# EAGLE board UMR2 (EAGLE 6.6.0)
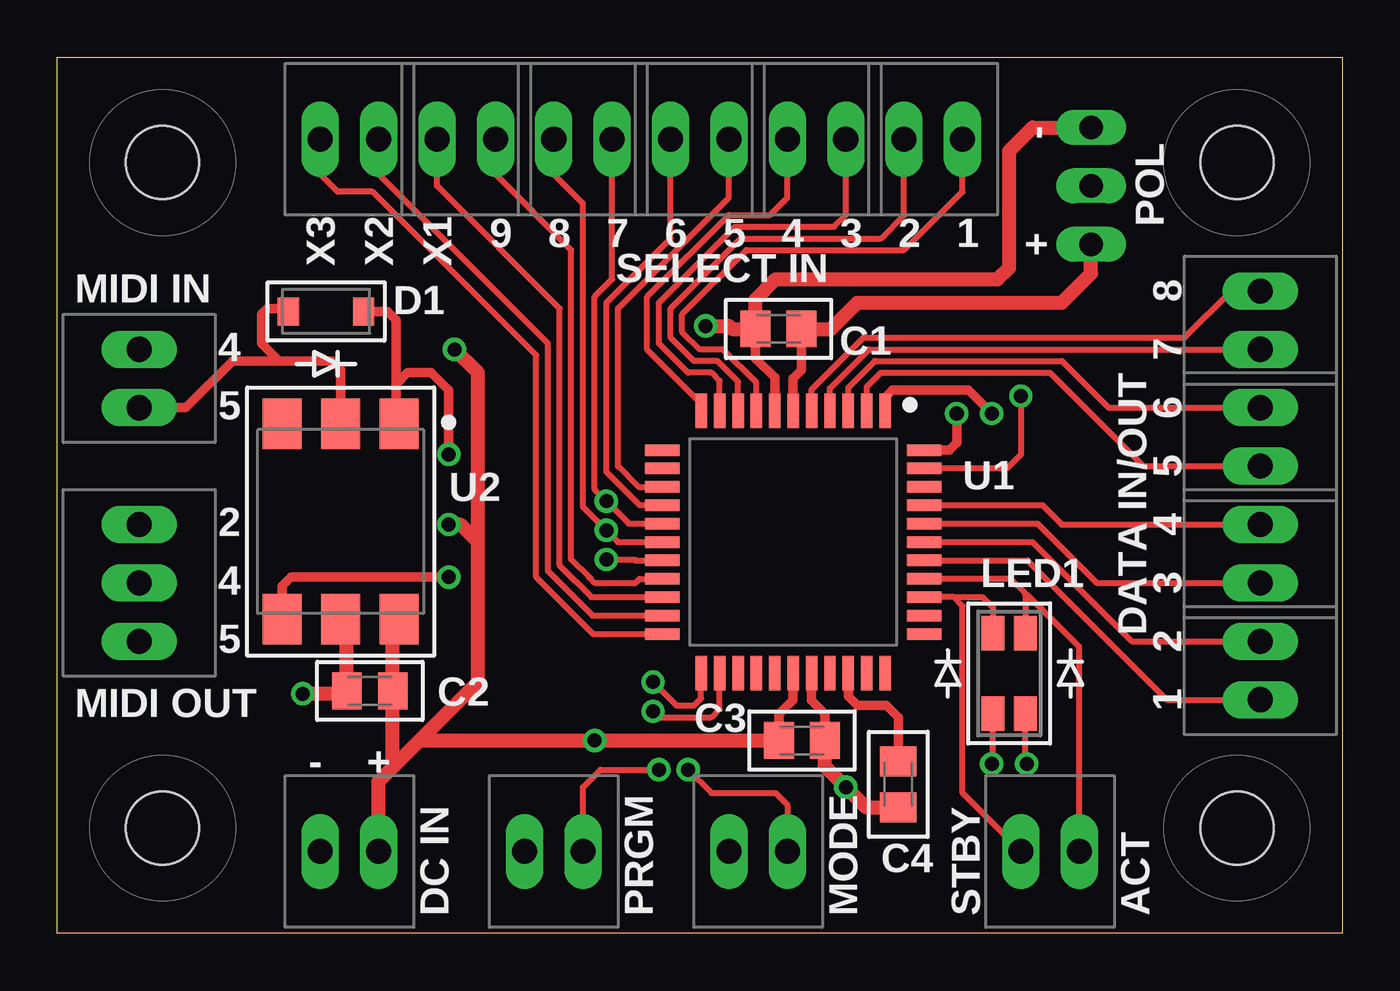
[diagram p0: board, top side]
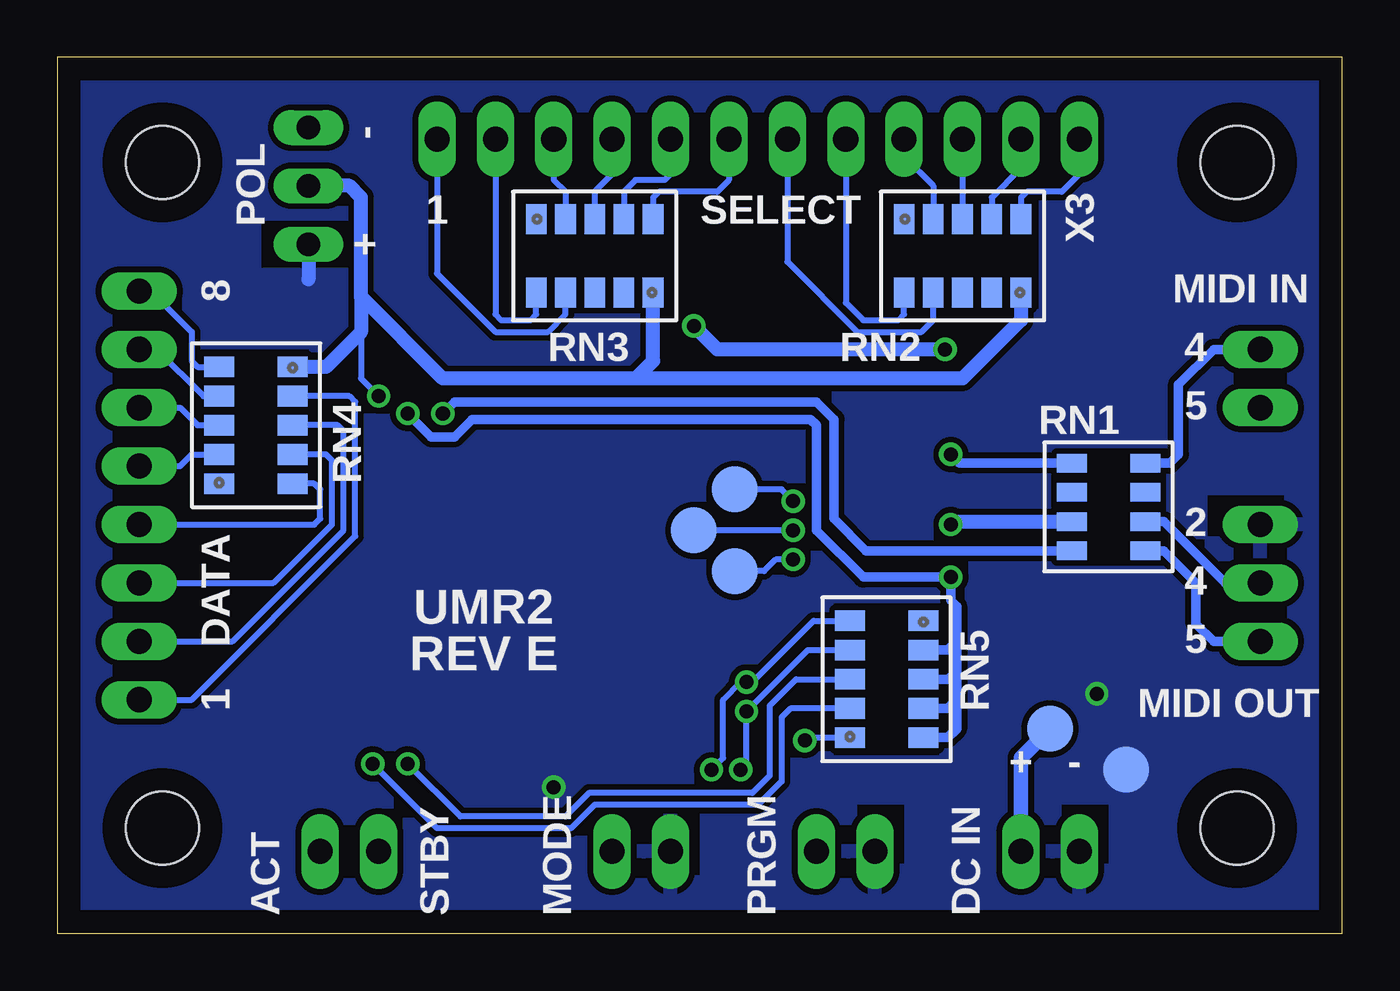
[diagram p1: board, bottom side, seen from below]

Size 55.88 x 38.1 mm. Coordinates in mm from the lower left corner, seen from the top.
Outline: 0,38.1 55.88,38.1 55.88,0 0,0 0,38.1
Copper layers (1*16): Top 0.0178mm / dielectric 59mil / Bottom 0.0178mm
Design rules "SSC-EAGLE-2Lyr_v1.0.0.3": minimum track width 10mil, minimum drill 14mil, track to track 10mil, track to pad 10mil, pad to pad 10mil, via to via 10mil, smd to smd 10mil, copper to edge 40mil, drill to drill 16mil, minimum pad ring 8mil, minimum via ring 8mil, stop-mask expansion 3mil, vias tented up to drill 0mil, thermal gap 10mil
Net classes: 0 default: width 0.254 mm, drill 0.305 mm, clearance 0.254 mm; 2 superfat: width 0.61 mm, drill 0.406 mm, clearance 0.762 mm; 3 grounder: width 0.254 mm, drill 0.508 mm, clearance 0.254 mm
Holes 3.17 mm at 51.31,33.53 4.57,33.53 51.31,4.57 4.57,4.57
bRestrict: area 2.5,17.3 to 5.8,19.1; area 10.2,3 to 12.2,5.6; area 19.1,3 to 21.1,5.6; area 27.9,2.5 to 30,5.1; area 43.2,29 to 47,31

## Footprints (pad centres in the part's own frame; a part is rotated, then mirrored left to right if it is on the bottom)
C0805K = smd 1.3 x 1.6: 1 -1,0; 2 1,0
SOD123-MIRROR = smd 1.219 x 0.914: P$1 0,1.638; P$2 0,-1.638
DOCKPAD-ROUND-2.0MM = smd 2 x 2: P$1 0,0
WIREPAD-NICE = drill 1.016 long: P$1 0,0
TB-2-54-2POS = drill 1.092 long: P$1 1.27,0; P$3 -1.27,0
TB-2-54-3POS = drill 1.092 long: P$1 0,0; P$2 2.54,0; P$3 -2.54,0
HSMF-C15X = smd 1.5 x 1: P$1 -1.75,0.7; P$2 1.75,0.7; P$3 1.75,-0.7; P$4 -1.75,-0.7
CTS-744 = smd 1.3 x 0.8: P$4 -1.6,-0.635; P$5 -1.6,-1.905; P$6 -1.6,0.635; P$7 -1.6,1.905; P$8 1.6,0.635; P$9 1.6,1.905; P$10 1.6,-0.635; P$11 1.6,-1.905
CTS-745 = smd 1.3 x 0.9: P$2 -1.6,0; P$3 1.6,0; P$4 -1.6,-1.27; P$5 -1.6,-2.54; P$6 -1.6,1.27; P$7 -1.6,2.54; P$8 1.6,1.27; P$9 1.6,2.54; P$10 1.6,-1.27; P$11 1.6,-2.54
TQFP44 = smd 1.5 x 0.5: P$1 5.7,0; P$2 -5.7,0; P$5 5.7,-0.8; P$6 5.7,-1.6; P$7 5.7,-2.4; P$8 5.7,-3.2; P$9 5.7,-4; P$10 5.7,0.8; P$11 5.7,1.6; P$12 5.7,2.4; P$13 5.7,3.2; P$14 5.7,4; P$25 -5.7,-0.8; P$26 -5.7,-1.6; P$27 -5.7,-2.4; P$28 -5.7,-3.2; P$29 -5.7,-4; P$30 -5.7,0.8; P$31 -5.7,1.6; P$32 -5.7,2.4; P$33 -5.7,3.2; P$34 -5.7,4 | smd 0.5 x 1.5: P$3 0,-5.7; P$4 0,5.7; P$15 0.8,5.7; P$16 1.6,5.7; P$17 2.4,5.7; P$18 3.2,5.7; P$19 4,5.7; P$20 -0.8,5.7; P$21 -1.6,5.7; P$22 -2.4,5.7; P$23 -3.2,5.7; P$24 -4,5.7; P$35 -0.8,-5.7; P$36 -1.6,-5.7; P$37 -2.4,-5.7; P$38 -3.2,-5.7; P$39 -4,-5.7; P$40 0.8,-5.7; P$41 1.6,-5.7; P$42 2.4,-5.7; P$43 3.2,-5.7; P$44 4,-5.7
SMT-6 = smd 2.2 x 1.7: P$4 4.25,2.54; P$5 4.25,0; P$6 4.25,-2.54; P$7 -4.25,-2.54; P$8 -4.25,0; P$9 -4.25,2.54

## Placement (x,y rotation side)
C1  [C0805K]  31.37,26.29 180 top
C2  [C0805K]  13.59,10.54 0 top
C3  [C0805K]  32.38,8.38 0 top
C4  [C0805K]  36.58,6.48 90 top
D1  [SOD123-MIRROR]  11.68,27.05 270 top
E$3  [DOCKPAD-ROUND-2.0MM]  9.4,7.11 0 bottom
E$4  [DOCKPAD-ROUND-2.0MM]  12.7,8.89 0 bottom
E$11  [WIREPAD-NICE]  44.96,35.05 90 top
E$12  [WIREPAD-NICE]  44.96,32.51 90 top
E$14  [WIREPAD-NICE]  44.96,29.97 90 top
E$15  [TB-2-54-2POS]  12.7,34.54 180 top
E$16  [TB-2-54-2POS]  17.78,34.54 180 top
E$25  [TB-2-54-2POS]  22.86,34.54 180 top
E$26  [TB-2-54-2POS]  27.94,34.54 180 top
E$34  [TB-2-54-2POS]  33.02,34.54 180 top
E$45  [TB-2-54-2POS]  38.1,34.54 180 top
E$46  [TB-2-54-2POS]  52.32,26.67 270 top
E$47  [TB-2-54-2POS]  52.32,21.59 270 top
E$48  [TB-2-54-2POS]  52.32,16.51 270 top
E$49  [TB-2-54-2POS]  52.32,11.43 270 top
E$50  [TB-2-54-2POS]  3.56,24.13 270 top
E$51  [TB-2-54-2POS]  12.7,3.56 0 top
E$52  [TB-2-54-3POS]  3.56,15.24 90 top
E$53  [TB-2-54-2POS]  21.59,3.56 0 top
E$54  [TB-2-54-2POS]  30.48,3.56 0 top
E$56  [TB-2-54-2POS]  43.18,3.56 0 top
E$57  [DOCKPAD-ROUND-2.0MM]  28.19,17.53 0 bottom
E$59  [DOCKPAD-ROUND-2.0MM]  26.42,19.3 0 bottom
E$92  [DOCKPAD-ROUND-2.0MM]  26.42,15.75 0 bottom
LED1  [HSMF-C15X]  41.4,11.3 90 top
RN1  221  [CTS-744]  10.16,18.54 180 bottom
RN2  153  [CTS-745]  16.51,29.46 270 bottom
RN3  153  [CTS-745]  32.51,29.46 270 bottom
RN4  153  [CTS-745]  47.24,22.1 0 bottom
RN5  222  [CTS-745]  19.81,11.05 180 bottom
U1  [TQFP44]  32,17.02 270 top
U2  [SMT-6]  12.32,17.91 270 top

## Library data of the parts
C1-C4 = rcl
D1 E$3 E$4 E$11 E$12 E$14-E$16 E$25 E$26 E$34 E$45-E$54 E$56 E$57 E$59 E$92 LED1 RN1-RN5 U1 U2 = 0jrs

## Nets
ACT: E$56.P$1 LED1.P$3 U1.P$16
DATA0: E$49.P$1 RN4.P$8 U1.P$15
DATA1: E$49.P$3 RN4.P$3 U1.P$4
DATA2: E$48.P$1 RN4.P$10 U1.P$20
DATA3: E$48.P$3 RN4.P$11 U1.P$21
DATA4: E$47.P$1 RN4.P$4 U1.P$33
DATA5: E$47.P$3 RN4.P$2 U1.P$32
DATA6: E$46.P$1 RN4.P$6 U1.P$31
DATA7: E$46.P$3 RN4.P$7 U1.P$30
GND: C1.1 C2.1 C3.2 C4.1 E$3.P$1 E$14.P$1 E$51.P$3 E$52.P$2 E$53.P$3 E$54.P$3 U1.P$2 U1.P$10 U2.P$5
MIDIIN5: D1.P$2 E$50.P$1 U2.P$8
MODE: E$54.P$1 RN5.P$11 U1.P$9
N$16: D1.P$1 RN1.P$11 U2.P$9
OUT2: U1.P$5
OUT5: U1.P$11
OUT6: U1.P$18
OUT7: U1.P$13
PRGM: E$53.P$1 RN5.P$10 U1.P$8
PULLX: E$12.P$1 RN2.P$9 RN3.P$9 RN4.P$9 U1.P$23
RX: RN5.P$2 RN5.P$4 RN5.P$6 RN5.P$7 U1.P$34 U2.P$6
S$3: E$52.P$3 RN1.P$7
S$4: E$52.P$1 RN1.P$6
S$6: LED1.P$4 RN5.P$8
S$10: U1.P$7
S$12: U1.P$6
S$20: U1.P$22
S$21: LED1.P$1 RN5.P$3
S$42: E$50.P$3 RN1.P$5
SELECT1: E$45.P$3 RN3.P$10 U1.P$26
SELECT2: E$45.P$1 RN3.P$11 U1.P$27
SELECT3: E$34.P$3 RN3.P$4 U1.P$28
SELECT4: E$34.P$1 RN3.P$2 U1.P$29
SELECT5: E$26.P$3 RN3.P$6 U1.P$37
SELECT6: E$26.P$1 RN3.P$7 U1.P$36
SELECT7-ICSPCLK: E$25.P$3 E$59.P$1 RN2.P$10 U1.P$35
SELECT8-ICSPDAT: E$25.P$1 E$57.P$1 RN2.P$11 U1.P$3
SELECT9: E$16.P$3 RN2.P$4 U1.P$41
STBY: E$56.P$3 LED1.P$2 U1.P$17
TX: RN1.P$9 U1.P$24
VCAP: C4.2 U1.P$12
VDD: C1.2 C2.2 C3.1 E$4.P$1 E$11.P$1 E$51.P$1 RN1.P$8 RN5.P$9 U1.P$1 U1.P$25 U2.P$4
VPP: E$92.P$1 U1.P$40
X1: E$16.P$1 RN2.P$2 U1.P$42
X2: E$15.P$3 RN2.P$6 U1.P$43
X3: E$15.P$1 RN2.P$7 U1.P$44

## Tracks (layer width: path | path; a pad name or v marks a point on that pad's centre or on a via)
ACT
  Top 0.254: U1.P$16 41.48,15.42 42.1,14.79 42.1,14.73 | 42.1,14.73 LED1.P$3 | 42.1,14.73 42.16,14.73 44.45,12.45 E$56.P$1
DATA0
  Top 0.254: U1.P$15 42.2,16.22 48.26,10.16 E$49.P$1
  Bottom 0.254: RN4.P$8 43.18,23.37 42.93,23.11 42.93,17.27 50.04,10.16 E$49.P$1
DATA1
  Top 0.254: U1.P$4 42.42,17.02 46.74,12.7 E$49.P$3
  Bottom 0.254: RN4.P$3 43.69,22.1 43.43,21.84 43.43,17.53 48.26,12.7 E$49.P$3
DATA2
  Top 0.254: U1.P$20 42.63,17.82 45.21,15.24 E$48.P$1
  Bottom 0.254: RN4.P$10 44.2,20.83 43.94,20.57 43.94,17.78 46.48,15.24 E$48.P$1
DATA3
  Top 0.254: U1.P$21 42.85,18.62 43.69,17.78 E$48.P$3
  Bottom 0.254: RN4.P$11 44.7,19.56 44.45,19.3 44.45,18.03 44.7,17.78 E$48.P$3
DATA4
  Top 0.254: U1.P$33 35.2,23.77 35.81,24.38 43.18,24.38 47.24,20.32 E$47.P$1
  Bottom 0.254: E$47.P$1 50.55,20.32 50.04,20.83 RN4.P$4
DATA5
  Top 0.254: U1.P$32 34.4,23.74 35.56,24.89 43.69,24.89 45.72,22.86 E$47.P$3
  Bottom 0.254: E$47.P$3 50.55,22.86 49.78,22.1 RN4.P$2
DATA6
  Top 0.254: U1.P$31 33.6,23.7 35.31,25.4 E$46.P$1
  Bottom 0.254: RN4.P$6 49.53,23.37 51.56,25.4 E$46.P$1
DATA7
  Top 0.254: U1.P$30 32.8,23.66 35.05,25.91 49.02,25.91 51.05,27.94 E$46.P$3
  Bottom 0.254: RN4.P$7 49.78,24.64 50.04,24.89 50.04,26.16 51.82,27.94 E$46.P$3
GND  (via drill 0.61)
  Top 0.406: U1.P$2 32,24.13 32.37,24.5 C1.1 | U1.P$10 32.8,10.12 33.38,9.54 C3.2
  Top 0.61: C1.1 33.66,26.29 34.8,27.43 43.69,27.43 44.96,28.7 E$14.P$1 | C4.1 35.16,5.48 v34.29,6.35 33.38,7.25 C3.2 | 12.25,13.66 12.19,13.72 | 12.25,13.66 U2.P$5 | 12.25,13.66 12.59,13.32 C2.1 12.59,10.56 | 12.59,10.56 12.7,10.67 | v10.67,10.41 12.45,10.41 12.59,10.56
  Bottom 0.61: E$14.P$1 44.96,28.45
  pour Bottom: -2.54,-2.54 -2.54,40.64 58.42,40.64 58.42,-2.54
MIDIIN5
  Top 0.254: 9.91,27.18 10.03,27.05 D1.P$2
  Top 0.406: U2.P$8 12.32,24.51 11.94,24.89 9.65,24.89 | 9.65,24.89 8.89,25.65 8.89,26.92 9.14,27.18 9.91,27.18 | 9.65,24.89 7.62,24.89 5.59,22.86 E$50.P$1
MODE  (via drill 0.61)
  Top 0.254: E$54.P$1 31.75,5.59 31.24,6.1 28.45,6.1 v27.43,7.11 | U1.P$9 28,10.22 27.69,9.91 26.92,9.91 v25.91,10.92
  Bottom 0.254: RN5.P$11 22.99,13.59 25.65,10.92 v25.91,10.92 26.16,10.92 26.92,10.16 26.92,7.62 v27.43,7.11
N$16  (via drill 0.61)
  Top 0.254: 14.73,24.89 14.73,24.64 | 14.73,22.28 U2.P$9
  Top 0.406: D1.P$1 14.35,27.05 14.73,26.67 14.73,24.89 14.73,23.88 | 14.73,23.88 14.73,22.28 | 14.73,23.88 15.24,24.38 16.26,24.38 17.02,23.62 v17.02,20.83
  Bottom 0.406: RN1.P$11 16.64,20.45 v17.02,20.83
PRGM  (via drill 0.61)
  Top 0.254: v26.16,7.11 23.62,7.11 22.86,6.35 E$53.P$1 | U1.P$8 28.8,9.75 28.45,9.4 26.16,9.4 v25.91,9.65
  Bottom 0.254: RN5.P$10 23.24,12.32 v25.91,9.65 25.91,7.37 v26.16,7.11
  Bottom 0.406: 21.34,12.45 21.41,12.37 RN5.P$10
PULLX  (via drill 0.61)
  Top 0.254: U1.P$23 41.3,20.22 41.91,20.83 v41.91,23.37
  Bottom 0.254: v41.91,23.37 42.67,24.13 42.67,27.69
  Bottom 0.61: E$12.P$1 43.18,32.51 42.67,32 42.67,27.69 | RN4.P$9 44.2,24.64 42.67,26.16 42.67,27.69 | RN3.P$9 29.97,24.89 30.73,24.13 | 42.67,27.69 39.12,24.13 30.73,24.13 | 30.73,24.13 16.51,24.13 13.97,26.67 RN2.P$9
RX  (via drill 0.61)
  Top 0.406: U1.P$34 36,23.3 36.32,23.62 39.62,23.62 v40.64,22.61 | v17.02,15.49 10.16,15.49 9.78,15.11 U2.P$6
  Bottom 0.406: v40.64,22.61 39.62,21.59 38.61,21.59 37.85,22.35 23.11,22.35 22.86,22.1 22.86,17.53 20.83,15.49 v17.02,15.49 | RN5.P$7 17.14,8.51 16.76,8.89 16.76,10.16 | 16.76,12.7 16.76,14.22 17.02,14.48 v17.02,15.49 | 16.76,12.7 16.76,11.43 | 16.76,11.43 16.76,10.16 | v17.02,15.49 17.02,15.75 | RN5.P$6 17.14,9.78 16.76,10.16 | RN5.P$2 17.14,11.05 16.76,11.43 | RN5.P$4 17.14,12.32 16.76,12.7
S$3
  Bottom 0.406: RN1.P$7 7.75,16.64 6.35,15.24 6.35,13.46 5.59,12.7 E$52.P$3
S$4
  Bottom 0.406: RN1.P$6 7.75,17.91 5.08,15.24 E$52.P$1
S$6  (via drill 0.61)
  Top 0.254: LED1.P$4 42.1,7.43 v42.16,7.37
  Bottom 0.254: RN5.P$8 24,9.78 24.38,9.4 24.38,6.6 25.4,5.59 32.51,5.59 33.53,4.57 39.37,4.57 v42.16,7.37
S$21  (via drill 0.61)
  Top 0.254: LED1.P$1 40.7,7.43 v40.64,7.37
  Bottom 0.254: RN5.P$3 23.75,11.05 24.89,9.91 24.89,6.86 25.65,6.1 32.77,6.1 33.78,5.08 38.35,5.08 v40.64,7.37
S$42
  Bottom 0.406: RN1.P$5 7.49,20.45 7.11,20.83 7.11,23.88 5.59,25.4 E$50.P$3
SELECT1
  Top 0.254: E$45.P$3 39.37,32.26 36.83,29.72 29.97,29.72 27.18,26.92 27.18,26.16 27.94,25.4 28.96,25.4 30.4,23.95 U1.P$26
  Bottom 0.254: RN3.P$10 33.78,26.92 34.54,26.16 36.83,26.16 39.37,28.7 E$45.P$3
SELECT2
  Top 0.254: E$45.P$1 36.83,31.24 35.81,30.23 29.72,30.23 26.67,27.18 26.67,25.91 27.69,24.89 28.7,24.89 29.6,23.99 U1.P$27
  Bottom 0.254: RN3.P$11 35.05,26.92 35.31,26.67 36.58,26.67 36.83,26.92 E$45.P$1
SELECT3
  Top 0.254: E$34.P$3 34.29,31.24 33.78,30.73 29.46,30.73 26.16,27.43 26.16,25.65 27.43,24.38 28.45,24.38 28.8,24.03 U1.P$28
  Bottom 0.254: RN3.P$4 33.78,32.26 34.29,32.77 E$34.P$3
SELECT4
  Top 0.254: E$34.P$1 31.75,32 30.99,31.24 29.21,31.24 25.65,27.69 25.65,25.4 28,23.05 U1.P$29
  Bottom 0.254: RN3.P$2 32.51,32.26 31.75,33.02 E$34.P$1
SELECT5
  Top 0.254: U1.P$37 25.29,19.42 24.38,20.32 24.38,27.18 29.21,32 E$26.P$3
  Bottom 0.254: RN3.P$6 31.24,32.26 30.73,32.77 29.46,32.77 29.21,33.02 E$26.P$3
SELECT6
  Top 0.254: E$26.P$1 26.67,30.23 23.88,27.43 23.88,20.07 25.32,18.62 U1.P$36
  Bottom 0.254: RN3.P$7 29.97,32 29.72,32.26 27.18,32.26 26.67,32.77 E$26.P$1
SELECT7-ICSPCLK  (via drill 0.61)
  Top 0.254: U1.P$35 24.85,17.82 v23.88,18.8 23.37,19.3 23.37,27.69 24.13,28.45 E$25.P$3
  Bottom 0.254: RN2.P$10 17.78,26.67 18.29,26.16 21.08,26.16 24.13,29.21 E$25.P$3 | E$59.P$1 24.38,19.3 v23.88,18.8
SELECT8-ICSPDAT  (via drill 0.61)
  Top 0.254: E$25.P$1 21.59,33.02 22.86,31.75 22.86,18.54 v23.88,17.53 24.38,17.02 U1.P$3
  Bottom 0.254: RN2.P$11 19.05,26.92 19.3,26.67 20.83,26.67 21.59,27.43 E$25.P$1 | v23.88,17.53 E$57.P$1
SELECT9
  Top 0.254: E$16.P$3 19.05,33.02 22.35,29.72 22.35,16.26 23.11,15.49 | 23.11,15.49 23.19,15.42 | U1.P$41 25.32,15.42 25.15,15.24 23.37,15.24 23.11,15.49
  Bottom 0.254: E$16.P$3 19.05,33.78 17.78,32.51 RN2.P$4
STBY
  Top 0.254: LED1.P$2 40.7,14.16 40.25,14.62 38.98,14.62 | 38.98,14.62 U1.P$17 | E$56.P$3 39.37,6.1 39.37,14.22 38.98,14.62
TX  (via drill 0.61)
  Top 0.406: U1.P$24 38.8,21.02 39.12,21.34 v39.12,22.61
  Bottom 0.406: RN1.P$9 20.7,16.64 22.1,18.03 22.1,22.35 22.86,23.11 38.61,23.11 v39.12,22.61
VCAP
  Top 0.406: U1.P$12 34.4,10.3 34.8,9.91 36.07,9.91 36.58,9.4 C4.2 36.58,7.37
VDD  (via drill 0.61)
  Top 0.406: U1.P$25 31.2,24.17 30.37,25 C1.2 | U1.P$1 32,10.16 31.39,9.54 C3.1
  Top 0.61: E$11.P$1 42.42,35.05 41.4,34.04 41.4,28.96 40.89,28.45 31.24,28.45 30.37,27.57 C1.2 29.34,26.29 29.21,26.42 v28.19,26.42 | U2.P$4 14.79,13.66 14.73,13.72 14.59,13.57 C2.2 14.59,7.22 14.48,7.11 | v17.02,17.78 17.53,17.78 18.29,17.02 | v17.27,25.4 18.29,24.38 18.29,17.02 | C3.1 v23.37,8.38 15.75,8.38 | 18.29,17.02 18.29,10.92 15.75,8.38 | 14.48,7.11 15.75,8.38 | 14.48,7.11 13.97,6.6 E$51.P$1
  Bottom 0.254: RN5.P$9 23.24,8.51 v23.37,8.38
  Bottom 0.61: RN1.P$8 16.89,17.91 v17.02,17.78 | v28.19,26.42 27.18,25.4 v17.27,25.4
  Bottom 0.635: E$4.P$1 13.97,7.62 E$51.P$1
VPP  (via drill 0.61)
  Top 0.254: v23.88,16.26 25.15,16.26 25.11,16.22 U1.P$40
  Bottom 0.254: v23.88,16.26 24.64,16.26 25.15,15.75 E$92.P$1
X1
  Top 0.254: E$16.P$1 16.51,32.51 21.84,27.18 21.84,16 23.23,14.62 U1.P$42
  Bottom 0.254: E$16.P$1 RN2.P$2
X2
  Top 0.254: E$15.P$3 13.97,33.02 21.34,25.65 21.34,15.75 23.27,13.82 U1.P$43
  Bottom 0.254: RN2.P$6 15.24,32 13.97,33.27 E$15.P$3
X3
  Top 0.254: E$15.P$1 11.43,33.02 12.19,32.26 13.72,32.26 20.83,25.15 20.83,15.49 23.3,13.02 U1.P$44
  Bottom 0.254: RN2.P$7 13.97,32 13.72,32.26 12.19,32.26 11.43,33.02 E$15.P$1

## Text on the board
tPlace: - | POL | X3 | X2 | X1 | 9 | 8 | 7 | 6 | 5 | 4 | 3 | 2 | 1 | + | SELECT IN | MIDI IN | 8 | 4 | 7 | 5 | 6 | 5 | 2 | 4 | 4 | 3 | DATA IN/OUT | 5 | 2 | 1 | MIDI OUT | - | + | + | DC IN | PRGM | MODE | STBY | ACT
bPlace: - | POL | X3 | SELECT | 1 | + | MIDI IN | 8 | 4 | 5 | 2 | 4 | UMR2 | 5 | REV E | DATA | 1 | MIDI OUT | - | + | DC IN | PRGM | MODE | STBY | ACT
Document: UMR2 / / copyright John Staskevich, 2017 / / john@codeandcopper.com / / / This work is licensed under a Creative Commons Attribution 4.0 International License. / http://creativecommons.org/licenses/by/4.0/